# Altium PCB DriverControlsPCB.PcbDoc
Units mm, origin at the board's own origin, x right, y up, seen from the top; angles counter-clockwise.
Board outline 165.35 x 38.23 mm, 2 copper layers (Top Layer, Bottom Layer); 129 components, 72 nets, 429 pads, 61 vias.
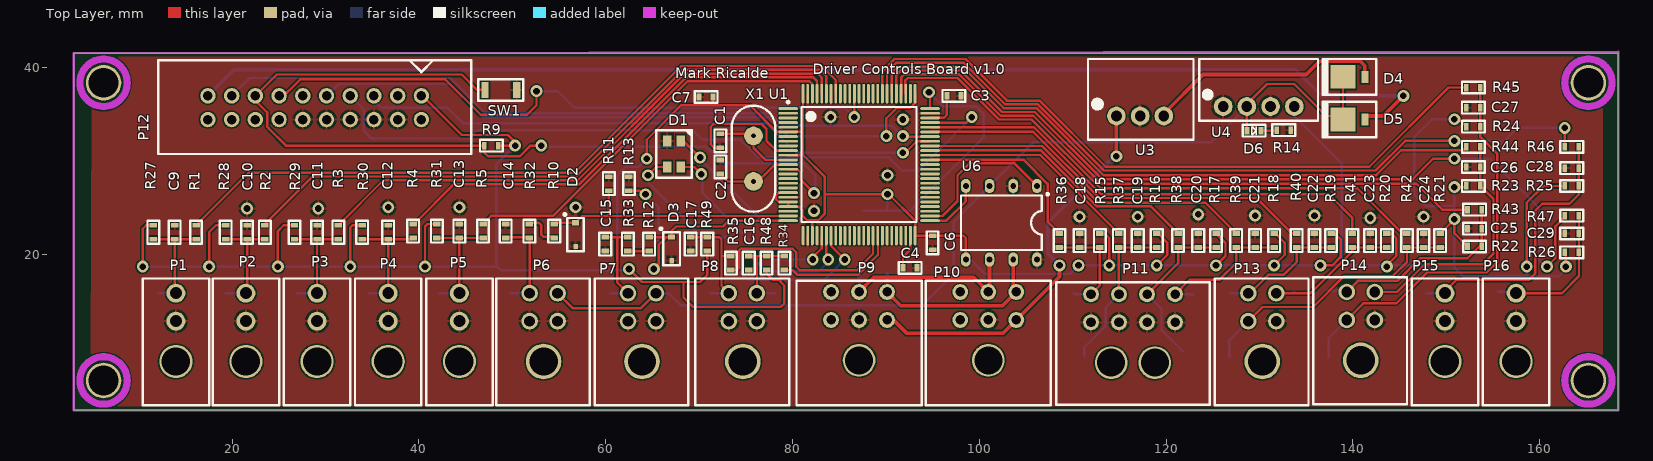
[diagram p0: Top Layer view]
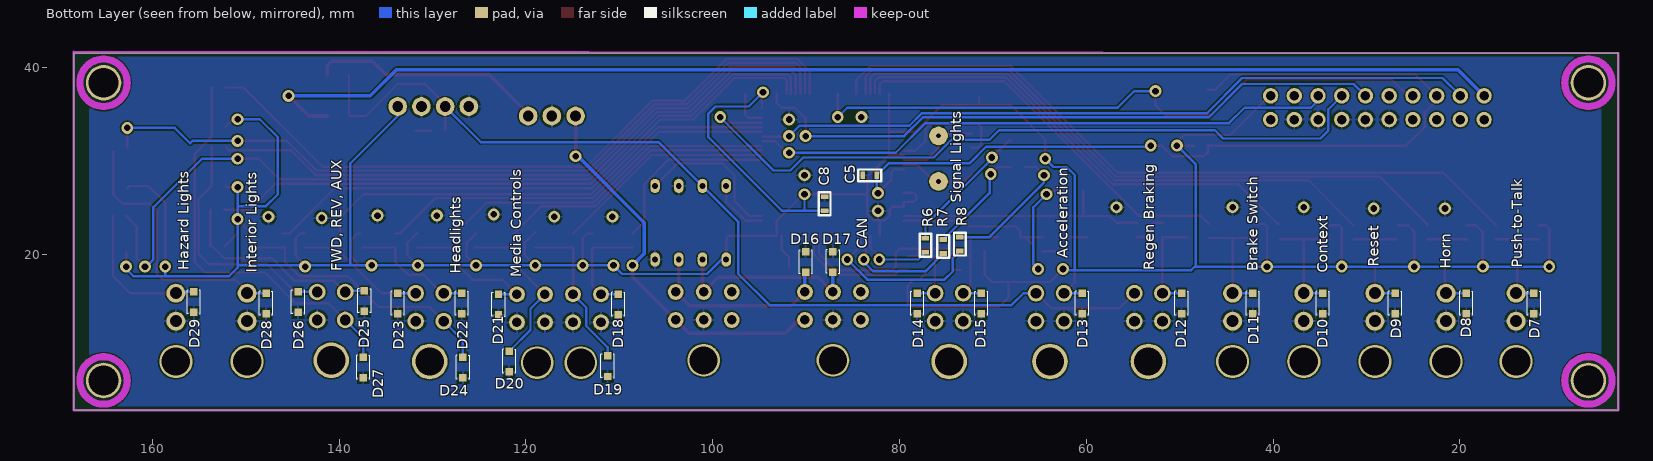
[diagram p1: Bottom Layer view, seen from below]
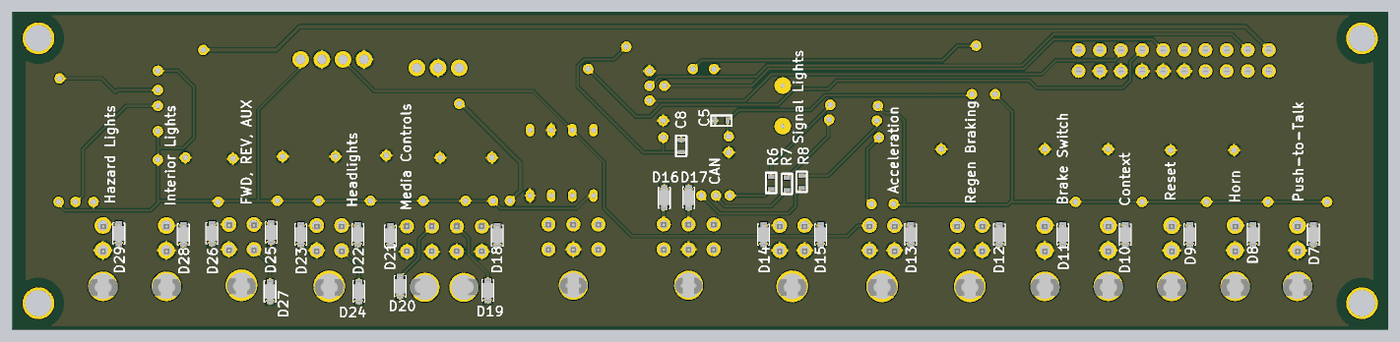
[diagram p2: 3D render of the assembled board from below, using the file's embedded part models]

## Layer stack, top to bottom
Top Solder: solder mask 0.0102, Solder Resist, Dk 3.5
Top Layer: signal copper 0.0356
Dielectric 1: dielectric 0.32, FR-4, Dk 4.8
Bottom Layer: signal copper 0.0356
Bottom Solder: solder mask 0.0102, Solder Resist, Dk 3.5

## Board outline
3.048,3.302 168.402,3.302 168.402,41.529 3.048,41.529

## Design rules (kind name [scope] priority, off if disabled: settings)
BoardOutlineClearance [All] p1: gap=0.381 ignorepadtopadclearanceinfootprint=FALSE
Clearance [All] p1: gap=0.152 ignorepadtopadclearanceinfootprint=FALSE except(0: Arc-Hole Track-Hole SMDPad-Hole THPad-Hole Via-Hole Fill-Hole Poly-Hole Region-Hole Text-Hole)
DiffPairsRouting [All] p1: maxlimit=0.254 minlimit=0.254 mostfreqgap=0.254 toplayer_minwidth=0.381 toplayer_maxwidth=0.381 toplayer_prefwidth=0.381 bottomlayer_minwidth=0.381 bottomlayer_maxwidth=0.381 bottomlayer_prefwidth=0.381 maxuncoupledlength=12.7
HoleSize [All] p1: absolutevalues=TRUE maxlimit=5.08 minlimit=0.33 maxpercent=80.000 minpercent=20.000
MinimumAnnularRing [All] p1: minimumring=0.178
MinimumSolderMaskSliver [All] p1: minsoldermaskwidth=0.127
PolygonConnect [All] p1: connectstyle=Relief reliefconductorwidth=0.254 reliefentries=4 polygonreliefangle="90 Angle" airgapwidth=0.254
RoutingVias [All] p1: holewidth=0.711 width=1.27 viastyle="Through Hole" minholewidth=0.711 minwidth=1.27 maxholewidth=0.711 maxwidth=1.27
SilkToSilkClearance [All] p1: silktosilkclearance=0.025
SilkToSolderMaskClearance [IsPad] p1: minsilkscreentomaskgap=0.076 clearancetoexposedcopper=TRUE
SolderMaskExpansion [All] p1: expansion=0.102
Width [All] p1: maxlimit=0.508 minlimit=0.152 preferedwidth=0.254
25 further rules are at their usual default settings.

## Classes and differential pairs
component class Communications: U6
component class Connectors: C9 C10 C11 C12 C13 C14 C15 C16 C17 C18 C19 C20 C21 D7 D8 D9 D10 D11 D12 D13 D14 D15 D16 D17 D18 D19 D20 D21 P1 P2 P3 P4 P5 P6 P7 P8 P9 P10 P11 P12 R1 R2 R3 R4 R5 R15 R16 R17 R18 R27 R28 R29 R30 R31 R32 R33 R34 R35 R36 R37 R38 R39 R48 R49
component class MCU: C1 C2 C3 C4 C5 D1 R6 R7 R8 R9 SW1 U1 X1
component class Power: C6 C7 C8 D4 D5 D6 R14 U3 U4
component class Signals: D2 D3 R10 R11 R12 R13
component class Connectors2: C22 C23 C24 C25 C26 C27 C28 C29 D22 D23 D24 D25 D26 D27 D28 D29 P13 P14 P15 P16 R19 R20 R21 R22 R23 R24 R25 R26 R40 R41 R42 R43 R44 R45 R46 R47
differential pair CAN2: +CAN2_P -CAN2_N

## Components (designator, comment, footprint, x,y, rotation, side; value= is the part's Value field where it differs from the comment)
C1 "SCH_GENERIC_CAPACITOR_0603" PCB_GENERIC_SMD_0603 72.263,32.131 r90 top
C2 "SCH_GENERIC_CAPACITOR_0603" PCB_GENERIC_SMD_0603 72.263,29.337 r270 top
C3 "SCH_GENERIC_CAPACITOR_0603" PCB_GENERIC_SMD_0603 97.282,36.957 r180 top
C4 "SCH_GENERIC_CAPACITOR_0603" PCB_GENERIC_SMD_0603 92.583,18.542 r180 top
C5 "SCH_GENERIC_CAPACITOR_0603" PCB_GENERIC_SMD_0603 83.185,28.448 r0 bottom
C6 "SCH_GENERIC_CAPACITOR_0603" PCB_GENERIC_SMD_0603 94.996,21.209 r90 top
C7 "SCH_GENERIC_CAPACITOR_0603" PCB_GENERIC_SMD_0603 70.739,36.83 r0 top
C8 "SCH_GENERIC_CAPACITOR_0603" PCB_GENERIC_SMD_0603 88.011,25.4 r270 bottom
C9 "SCH_GENERIC_CAPACITOR_0603" PCB_GENERIC_SMD_0603 13.843,22.352 r270 top
C10 "SCH_GENERIC_CAPACITOR_0603" PCB_GENERIC_SMD_0603 21.59,22.352 r270 top
C11 "SCH_GENERIC_CAPACITOR_0603" PCB_GENERIC_SMD_0603 29.083,22.352 r270 top
C12 "SCH_GENERIC_CAPACITOR_0603" PCB_GENERIC_SMD_0603 36.703,22.352 r90 top
C13 "SCH_GENERIC_CAPACITOR_0603" PCB_GENERIC_SMD_0603 44.323,22.479 r90 top
C14 "SCH_GENERIC_CAPACITOR_0603" PCB_GENERIC_SMD_0603 49.276,22.479 r90 top
C15 "SCH_GENERIC_CAPACITOR_0603" PCB_GENERIC_SMD_0603 59.944,21.082 r90 top
C16 "SCH_GENERIC_CAPACITOR_0603" PCB_GENERIC_SMD_0603 75.311,19.05 r90 top
C17 "SCH_GENERIC_CAPACITOR_0603" PCB_GENERIC_SMD_0603 69.088,21.082 r90 top
C18 "SCH_GENERIC_CAPACITOR_0603" PCB_GENERIC_SMD_0603 110.744,21.463 r270 top
C19 "SCH_GENERIC_CAPACITOR_0603" PCB_GENERIC_SMD_0603 116.967,21.463 r270 top
C20 "SCH_GENERIC_CAPACITOR_0603" PCB_GENERIC_SMD_0603 123.444,21.463 r270 top
C21 "SCH_GENERIC_CAPACITOR_0603" PCB_GENERIC_SMD_0603 129.54,21.463 r270 top
C22 "SCH_GENERIC_CAPACITOR_0603" PCB_GENERIC_SMD_0603 135.89,21.463 r270 top
C23 "SCH_GENERIC_CAPACITOR_0603" PCB_GENERIC_SMD_0603 141.859,21.463 r270 top
C24 "SCH_GENERIC_CAPACITOR_0603" PCB_GENERIC_SMD_0603 147.574,21.463 r270 top
C25 "SCH_GENERIC_CAPACITOR_0603" PCB_GENERIC_SMD_0603 153.035,22.733 r0 top
C26 "SCH_GENERIC_CAPACITOR_0603" PCB_GENERIC_SMD_0603 152.908,29.337 r0 top
C27 "SCH_GENERIC_CAPACITOR_0603" PCB_GENERIC_SMD_0603 152.908,35.687 r0 top
C28 "SCH_GENERIC_CAPACITOR_0603" PCB_GENERIC_SMD_0603 163.449,29.21 r180 top
C29 "SCH_GENERIC_CAPACITOR_0603" PCB_GENERIC_SMD_0603 163.449,22.225 r180 top
D1 "TriColourLED" "TricolourLED - SunLED - DK  1497-1225-2-ND" 67.31,30.734 r90 top
D2 "Zener Diode" PCBComponent_1 56.769,22.098 r90 top
D3 "Zener Diode" PCBComponent_1 67.056,20.574 r90 top
D4 "Schottky Diode" "ON Semi Schottky Diode - MBRM110LT1G" 140.589,38.989 r0 top
D5 "Schottky Diode" "ON Semi Schottky Diode - MBRM110LT1G" 140.589,34.417 r0 top
D6 "RED LED" SMD_0603_LED 129.413,33.274 r0 top
D7 "TVS Diode" "TVS Diode" 12.065,14.732 r0 bottom
D8 "TVS Diode" "TVS Diode" 19.304,14.732 r180 bottom
D9 "TVS Diode" "TVS Diode" 26.924,14.732 r180 bottom
D10 "TVS Diode" "TVS Diode" 34.671,14.732 r180 bottom
D11 "TVS Diode" "TVS Diode" 42.164,14.732 r180 bottom
D12 "TVS Diode" "TVS Diode" 49.784,14.732 r180 bottom
D13 "TVS Diode" "TVS Diode" 60.452,14.732 r180 bottom
D14 "TVS Diode" "TVS Diode" 78.105,14.732 r0 bottom
D15 "TVS Diode" "TVS Diode" 71.247,14.732 r0 bottom
D16 "TVS Diode" "TVS Diode" 90.043,19.177 r0 bottom
D17 "TVS Diode" "TVS Diode" 87.122,19.177 r180 bottom
D18 "TVS Diode" "TVS Diode" 110.109,14.605 r180 bottom
D19 "TVS Diode" "TVS Diode" 111.252,8.001 r180 bottom
D20 "TVS Diode" "TVS Diode" 121.793,8.509 r180 bottom
D21 "TVS Diode" "TVS Diode" 122.936,14.605 r0 bottom
D22 "TVS Diode" "TVS Diode" 126.873,14.732 r180 bottom
D23 "TVS Diode" "TVS Diode" 133.731,14.732 r180 bottom
D24 "TVS Diode" "TVS Diode" 126.746,7.874 r180 bottom
D25 "TVS Diode" "TVS Diode" 137.287,14.986 r180 bottom
D26 "TVS Diode" "TVS Diode" 144.399,14.859 r180 bottom
D27 "TVS Diode" "TVS Diode" 137.414,7.874 r180 bottom
D28 "TVS Diode" "TVS Diode" 147.828,14.732 r180 bottom
D29 "TVS Diode" "TVS Diode" 155.575,14.859 r180 bottom
P1 "SCH_MLX_1X2" PCB_MLX_MICROFIT_1X2 13.97,10.541 r0 top
P2 "SCH_MLX_1X2" PCB_MLX_MICROFIT_1X2 21.463,10.541 r0 top
P3 "SCH_MLX_1X2" PCB_MLX_MICROFIT_1X2 29.083,10.541 r0 top
P4 "SCH_MLX_1X2" PCB_MLX_MICROFIT_1X2 36.703,10.541 r0 top
P5 "SCH_MLX_1X2" PCB_MLX_MICROFIT_1X2 44.323,10.541 r0 top
P6 "MLX_MICROFIT_2X2" MLX_MICROFIT_2X2 53.34,10.541 r0 top
P7 "MLX_MICROFIT_2X2" MLX_MICROFIT_2X2 63.881,10.541 r0 top
P8 "MLX_MICROFIT_2X2" MLX_MICROFIT_2X2 74.676,10.541 r0 top
P9 "SCH_MLX_MICROFIT_3X2" PCB_MLX_MICROFIT_3X2 87.122,8.636 r0 top
P10 "SCH_MLX_MICROFIT_3X2" PCB_MLX_MICROFIT_3X2 100.965,8.636 r0 top
P11 "SCH_MLX_MICROFIT_4X2" PCB_MLX_MICROFIT_4X2 116.459,12.7 r0 top
P12 "SWD/VCOM Header - J-Link" "Samtec TST-110-01-G-D" 17.399,36.957 r0 top
P13 "MLX_MICROFIT_2X2" MLX_MICROFIT_2X2 130.302,10.541 r0 top
P14 "MLX_MICROFIT_2X2" MLX_MICROFIT_2X2 140.843,10.668 r0 top
P15 "SCH_MLX_1X2" PCB_MLX_MICROFIT_1X2 149.86,10.541 r0 top
P16 "SCH_MLX_1X2" PCB_MLX_MICROFIT_1X2 157.48,10.541 r0 top
R1 "SCH_GENERIC_RESISTOR_0603" PCB_GENERIC_SMD_0603 16.129,22.352 r90 top
R2 "SCH_GENERIC_RESISTOR_0603" PCB_GENERIC_SMD_0603 23.495,22.352 r90 top
R3 "SCH_GENERIC_RESISTOR_0603" PCB_GENERIC_SMD_0603 31.369,22.352 r90 top
R4 "SCH_GENERIC_RESISTOR_0603" PCB_GENERIC_SMD_0603 39.37,22.479 r90 top
R5 "SCH_GENERIC_RESISTOR_0603" PCB_GENERIC_SMD_0603 46.863,22.479 r90 top
R6 "SCH_GENERIC_RESISTOR_0603" PCB_GENERIC_SMD_0603 77.216,20.955 r90 bottom
R7 "SCH_GENERIC_RESISTOR_0603" PCB_GENERIC_SMD_0603 75.311,20.828 r90 bottom
R8 "SCH_GENERIC_RESISTOR_0603" PCB_GENERIC_SMD_0603 73.533,21.082 r90 bottom
R9 "SCH_GENERIC_RESISTOR_0603" PCB_GENERIC_SMD_0603 47.752,31.623 r180 top
R10 "SCH_GENERIC_RESISTOR_0603" PCB_GENERIC_SMD_0603 54.483,22.479 r270 top
R11 "SCH_GENERIC_RESISTOR_0603" PCB_GENERIC_SMD_0603 60.325,27.559 r270 top
R12 "SCH_GENERIC_RESISTOR_0603" PCB_GENERIC_SMD_0603 64.643,21.082 r270 top
R13 "SCH_GENERIC_RESISTOR_0603" PCB_GENERIC_SMD_0603 62.484,27.559 r270 top
R14 "SCH_GENERIC_RESISTOR_0603" PCB_GENERIC_SMD_0603 132.588,33.274 r0 top
R15 "SCH_GENERIC_RESISTOR_0603" PCB_GENERIC_SMD_0603 112.903,21.463 r270 top
R16 "SCH_GENERIC_RESISTOR_0603" PCB_GENERIC_SMD_0603 118.999,21.463 r270 top
R17 "SCH_GENERIC_RESISTOR_0603" PCB_GENERIC_SMD_0603 125.349,21.463 r270 top
R18 "SCH_GENERIC_RESISTOR_0603" PCB_GENERIC_SMD_0603 131.572,21.463 r270 top
R19 "SCH_GENERIC_RESISTOR_0603" PCB_GENERIC_SMD_0603 137.668,21.463 r270 top
R20 "SCH_GENERIC_RESISTOR_0603" PCB_GENERIC_SMD_0603 143.637,21.463 r270 top
R21 "SCH_GENERIC_RESISTOR_0603" PCB_GENERIC_SMD_0603 149.352,21.463 r270 top
R22 "SCH_GENERIC_RESISTOR_0603" PCB_GENERIC_SMD_0603 153.035,20.828 r0 top
R23 "SCH_GENERIC_RESISTOR_0603" PCB_GENERIC_SMD_0603 152.908,27.305 r0 top
R24 "SCH_GENERIC_RESISTOR_0603" PCB_GENERIC_SMD_0603 152.908,33.655 r0 top
R25 "SCH_GENERIC_RESISTOR_0603" PCB_GENERIC_SMD_0603 163.449,27.305 r180 top
R26 "SCH_GENERIC_RESISTOR_0603" PCB_GENERIC_SMD_0603 163.449,20.193 r180 top
R27 "SCH_GENERIC_RESISTOR_0603" PCB_GENERIC_SMD_0603 11.557,22.352 r270 top
R28 "SCH_GENERIC_RESISTOR_0603" PCB_GENERIC_SMD_0603 19.304,22.352 r270 top
R29 "SCH_GENERIC_RESISTOR_0603" PCB_GENERIC_SMD_0603 26.67,22.352 r270 top
R30 "SCH_GENERIC_RESISTOR_0603" PCB_GENERIC_SMD_0603 33.909,22.352 r90 top
R31 "SCH_GENERIC_RESISTOR_0603" PCB_GENERIC_SMD_0603 41.91,22.479 r90 top
R32 "SCH_GENERIC_RESISTOR_0603" PCB_GENERIC_SMD_0603 51.816,22.479 r90 top
R33 "SCH_GENERIC_RESISTOR_0603" PCB_GENERIC_SMD_0603 62.357,21.082 r90 top
R34 "SCH_GENERIC_RESISTOR_0603" PCB_GENERIC_SMD_0603 79.121,19.05 r90 top
R35 "SCH_GENERIC_RESISTOR_0603" PCB_GENERIC_SMD_0603 73.406,19.05 r90 top
R36 "SCH_GENERIC_RESISTOR_0603" PCB_GENERIC_SMD_0603 108.585,21.463 r270 top
R37 "SCH_GENERIC_RESISTOR_0603" PCB_GENERIC_SMD_0603 114.935,21.463 r270 top
R38 "SCH_GENERIC_RESISTOR_0603" PCB_GENERIC_SMD_0603 121.285,21.463 r270 top
R39 "SCH_GENERIC_RESISTOR_0603" PCB_GENERIC_SMD_0603 127.508,21.463 r270 top
R40 "SCH_GENERIC_RESISTOR_0603" PCB_GENERIC_SMD_0603 133.985,21.463 r270 top
R41 "SCH_GENERIC_RESISTOR_0603" PCB_GENERIC_SMD_0603 139.954,21.463 r270 top
R42 "SCH_GENERIC_RESISTOR_0603" PCB_GENERIC_SMD_0603 145.796,21.463 r270 top
R43 "SCH_GENERIC_RESISTOR_0603" PCB_GENERIC_SMD_0603 153.035,24.765 r0 top
R44 "SCH_GENERIC_RESISTOR_0603" PCB_GENERIC_SMD_0603 152.908,31.496 r0 top
R45 "SCH_GENERIC_RESISTOR_0603" PCB_GENERIC_SMD_0603 152.908,37.846 r0 top
R46 "SCH_GENERIC_RESISTOR_0603" PCB_GENERIC_SMD_0603 163.449,31.496 r0 top
R47 "SCH_GENERIC_RESISTOR_0603" PCB_GENERIC_SMD_0603 163.449,24.13 r0 top
R48 "SCH_GENERIC_RESISTOR_0603" PCB_GENERIC_SMD_0603 77.216,19.05 r270 top
R49 "SCH_GENERIC_RESISTOR_0603" PCB_GENERIC_SMD_0603 70.866,21.082 r90 top
SW1 "Reset Switch" "Push Button Switch" 48.768,37.592 r0 top
U1 "STM32F407VGT6" STM-LQFP100_M 87.122,29.591 r0 top
U3 "R78E-1.0 DC/DC" R78-1.0 117.221,34.798 r0 top
U4 "RECOM RO Series" "RECOM RO Series 1W DCDC" 126.111,35.814 r0 top
U6 "MCP2562" MCP2562 102.362,23.368 r270 top
X1 "XTAL" CRYSTAL_8MHZ 75.819,30.226 r270 top

## Footprints (in the part's own frame and the unit in brackets; to place one, negate y for a bottom-side part, rotate by r counter-clockwise, add the part's x,y. Pads: shape width x height; smd on the part's side, far side on the other; paste and mask are expansions set on the pad)
CRYSTAL_8MHZ [mm] "631-1100-ND"
  round 2 hole 0.5: 1(-2.44,0) 2(2.44,0)
  silkscreen extent -5.68,-2.32 5.68,2.32, body extent -5.59,-1.85 5.59,1.85, height 3.6
MCP2562 [mil]
  oval 60x40 hole 25: 1(-155,150) 2(-155,50) 3(-155,-50) 4(-155,-150) 5(155,-150) 6(155,-50) 7(155,50) 8(155,150)
  silkscreen extent -125,-170 115,200, body extent -115,-170 115,170, height 210
MLX_MICROFIT_2X2 [mil]
  round 70 hole 45: 1(59,90) 2(-59,90) 3(59,208) 4(-59,208)
  round 150 hole 120: ""(0,-80)
  silkscreen extent -200,-265 195,270, body extent -200,-266 200,216, height 345
"ON Semi Schottky Diode - MBRM110LT1G" [mil]
  rect 105x100 smd: 1(-65,0)
  rect 30x50 smd: 2(27.5,0)
  silkscreen extent -150,-75 75,75, body extent -115,-65 0,65, height 40
PCB_GENERIC_SMD_0603 [mm]
  rect 0.5x0.8 smd: 1(-0.75,0) 2(0.75,0)
  silkscreen extent -1.22,-0.63 1.22,0.63, body extent -0.75,-0.5 0.75,0.5, height 0.45
PCB_MLX_MICROFIT_1X2 [mil]
  round 80 hole 50: 1(0,90) 2(0,208)
  round 140 hole 120: ""(0,-80)
  silkscreen extent -140,-265 140,270, body extent -141,-266 140,216, height 345
PCB_MLX_MICROFIT_3X2 [mm]
  round 1.7 hole 1.02: 1(3,4.32) 2(0,4.32) 3(-3,4.32) 4(3,7.32) 5(0,7.32) 6(-3,7.32)
  round 3.5 hole 3: ""(0,0)
  silkscreen extent -6.7,-4.8 6.7,8.5, body extent -6.57,-4.65 6.58,7.59, height 8.83
PCB_MLX_MICROFIT_4X2 [mm] "Molex MicroFit 4x2 Connector"
  round 1.7 hole 1.02: 1(4.5,0) 2(1.5,0) 3(-1.5,0) 4(-4.5,0) 5(4.5,3) 6(1.5,3) 7(-1.5,3) 8(-4.5,3)
  round 3.5 hole 3: ""(-2.34,-4.32) ""(2.34,-4.32)
  silkscreen extent -8.23,-8.82 8.2,4.28, body extent -8.05,-8.87 8.1,3.37, height 8.83
PCBComponent_1 [mm]
  rect 0.55x0.75 smd: 1(1.27,0)
  rect 0.55x0.5 smd: 2(-1.27,0)
  silkscreen extent -1.78,-0.89 2.29,1.27, body extent -0.89,-0.64 0.89,0.64, height 0.7
"Push Button Switch" [mm]
  rect 0.8x1.7 smd: 1(-1.7,0) 2(1.7,0)
  silkscreen extent -2.41,-1.14 2.41,1.14, body extent -2.16,-0.89 2.16,0.89, height 1.6
R78-1.0 [mm]
  round 2 hole 1.15: 1(-2.54,0) 2(0,0) 3(2.54,0)
  silkscreen extent -5.59,-2.54 5.71,6.1, body extent -4.44,-1.59 4.45,5.4, height 10.4
"RECOM RO Series 1W DCDC" [mm] "RO-053.3S"
  round 2 hole 1.15: 1(0,0) 2(2.54,0) 3(5.08,0) 4(7.62,0)
  silkscreen extent -2.54,-1.52 10.16,5.08, body extent -2.41,-1.4 10.03,4.95, height 10
"Samtec TST-110-01-G-D" [mil] "TST-110-01-G-D"
  round 65 hole 40: 1(900,0) 2(900,-100) 3(800,0) 4(800,-100) 5(700,0) 6(700,-100) 7(600,0) 8(600,-100) 9(500,0) 10(500,-100) 11(400,0) 12(400,-100) 13(300,0) 14(300,-100) 15(200,0) 16(200,-100) 17(100,0) 18(100,-100) 19(0,0) 20(0,-100)
  silkscreen extent -210,-245 1110,150, body extent -200,-233 1100,132, height 350
SMD_0603_LED [mm]
  rect 0.5x0.8 smd: 1(-0.747,-0.047) 2(0.753,-0.047)
  silkscreen extent -1.22,-0.67 1.23,0.58, body extent -0.75,-0.55 0.75,0.45, height 0.45
STM-LQFP100_M [mm] "Thin QFP, 100-Leads, Body 14x14mm, Pitch 0.5mm, IPC Low Density"
  oval 2.1x0.3 smd: 1(-7.6,6) 2(-7.6,5.5) 3(-7.6,5) 4(-7.6,4.5) 5(-7.6,4) 6(-7.6,3.5) 7(-7.6,3) 8(-7.6,2.5) 9(-7.6,2) 10(-7.6,1.5) 11(-7.6,1) 12(-7.6,0.5) 13(-7.6,0) 14(-7.6,-0.5) 15(-7.6,-1) 16(-7.6,-1.5) 17(-7.6,-2) 18(-7.6,-2.5) 19(-7.6,-3) 20(-7.6,-3.5) 21(-7.6,-4) 22(-7.6,-4.5) 23(-7.6,-5) 24(-7.6,-5.5) 25(-7.6,-6) 51(7.6,-6) 52(7.6,-5.5) 53(7.6,-5) 54(7.6,-4.5) 55(7.6,-4) 56(7.6,-3.5) 57(7.6,-3) 58(7.6,-2.5) 59(7.6,-2) 60(7.6,-1.5) 61(7.6,-1) 62(7.6,-0.5) 63(7.6,0) 64(7.6,0.5) 65(7.6,1) 66(7.6,1.5) 67(7.6,2) 68(7.6,2.5) 69(7.6,3) 70(7.6,3.5) 71(7.6,4) 72(7.6,4.5) 73(7.6,5) 74(7.6,5.5) 75(7.6,6)
  oval 0.3x2.1 smd: 26(-6,-7.6) 27(-5.5,-7.6) 28(-5,-7.6) 29(-4.5,-7.6) 30(-4,-7.6) 31(-3.5,-7.6) 32(-3,-7.6) 33(-2.5,-7.6) 34(-2,-7.6) 35(-1.5,-7.6) 36(-1,-7.6) 37(-0.5,-7.6) 38(0,-7.6) 39(0.5,-7.6) 40(1,-7.6) 41(1.5,-7.6) 42(2,-7.6) 43(2.5,-7.6) 44(3,-7.6) 45(3.5,-7.6) 46(4,-7.6) 47(4.5,-7.6) 48(5,-7.6) 49(5.5,-7.6) 50(6,-7.6) 76(6,7.6) 77(5.5,7.6) 78(5,7.6) 79(4.5,7.6) 80(4,7.6) 81(3.5,7.6) 82(3,7.6) 83(2.5,7.6) 84(2,7.6) 85(1.5,7.6) 86(1,7.6) 87(0.5,7.6) 88(0,7.6) 89(-0.5,7.6) 90(-1,7.6) 91(-1.5,7.6) 92(-2,7.6) 93(-2.5,7.6) 94(-3,7.6) 95(-3.5,7.6) 96(-4,7.6) 97(-4.5,7.6) 98(-5,7.6) 99(-5.5,7.6) 100(-6,7.6)
  silkscreen extent -7.72,-6.15 6.15,6.82, body extent -7,-7 7,7, height 1.6
"TricolourLED - SunLED - DK  1497-1225-2-ND" [mm]
  rect 1.2x0.9 smd: 1(1.4,-0.725) 2(-1.4,-0.725) 3(-1.4,0.725) 4(1.4,0.725)
  silkscreen extent -2.54,-1.91 2.54,1.91, body extent -1.84,-1.52 1.84,1.52, height 1.9
"TVS Diode" [mm]
  rect 0.8x0.8 smd: 1(0,1.1) 2(0,-1.1)
  silkscreen extent -0.71,-1.27 0.71,1.3, body extent -0.65,-1.27 0.65,1.27, height 1.04

## Part data
C1 C2 C3 C4 C5 C6 C7 C8 C9 C10 C11 C12 C13 C14 C15 C16 C17 C18 C19 C20 C21 C22 C23 C24 C25 C26 C27 C28 C29: "Generic SMD capacitor 0603"
D2 D3 D4 D5: library part "ON Semi Schottky Diode - MBRM110LT1G"
D6: library part SMD_0603_LED
P11: "Molex Microfit Connector 4x2"
P12: library part "SWD/VCOM Header"
R1 R2 R3 R4 R5 R6 R7 R8 R9 R10 R11 R12 R13 R14 R15 R16 R17 R18 R19 R20 R21 R22 R23 R24 R25 R26 R27 R28 R29 R30 R31 R32 R33 R34 R35 R36 R37 R38 R39 R40 R41 R42 R43 R44 R45 R46 R47 R48 R49: "Generic SMD resistor 0603"
SW1: library part PushButtonSwitch
U1: "ARM Cortex-M4 32-bit MCU+FPU, 210 DMIPS, 1024 kB Flash, 192 kB Internal RAM, 82 I/Os, 100-pin LQFP, -40 to 85 degC, Tray"
U3: library part R78E-1.0
U4: library part "RECOM RO Series DCDC Converter"
X1: library part Crystal

## Free pads (board coordinates)
  round 3.81 hole 3.175: ""(6.223,6.477) ""(6.223,38.354) ""(165.227,6.477) ""(165.227,38.354)

## Via types
v1: diameter 1.27, hole 0.711, Top Layer to Bottom Layer, 61 vias

## Nets (pads, with @x,y where several pads share a name; then routed paths per layer and width w, separated by ;. In a path a pad name is that pad's centre, name@x,y a point inside that pad or via, vN(x,y) a via of type N, cw(c..) or ccw(c..) an arc to the next point about the centre after c; other vN are vias at no path point)
"3.3 V": C6.2 C7.2 C8.2 P12.1 R9.1 R15.1 R16.1 R17.1 R18.1 R19.1 R20.1 R21.1 R22.1 R23.1 R24.1 R25.2 R26.2 R27.1 R28.1 R29.1 R30.2 R31.2 R48.2 R49.1 U1.6 U1.11 U1.19 U1.21 U1.22 U1.28 U1.50 U1.75 U1.100 U4.4 U6.5 | length 409.4
  Top Layer w0.254: v1(10.414,18.669) 10.414,22.721 10.795,23.102 R27.1 ; v1(17.526,18.669) 17.526,22.352 18.276,23.102 R28.1 ; v1(24.892,18.669) 24.892,22.479 25.515,23.102 R29.1 ; v1(32.639,18.669) 32.639,22.86 32.881,23.102 R30.2 ; v1(40.64,18.669) 40.64,22.963 40.906,23.229 R31.2 ; P12.1@40.894,36.449 44.577,32.766 49.53,32.766 50.292,32.004 v1(50.292,31.623) R9.1 ; v1@62.611,18.542 v1(62.484,18.415) 63.881,17.018 70.104,17.018 70.866,17.78 R49.1 ; v1(64.389,30.226) 64.389,32.258 68.072,35.941 75.438,35.941 78.288,33.091 U1.6 81.122,33.091 ; 68.326,17.018 68.326,15.367 69.342,14.351 78.74,14.351 79.121,14.732 79.121,16.637 78.486,17.272 77.851,17.272 77.216,17.907 R48.2 ; 71.489,35.941 C7.2 ; U1.19 78.515,26.591 78.193,26.269 78.193,25.913 78.515,25.591 U1.21 U1.22 80.7,25.091 81.026,24.765 81.026,24.163 81.567,23.622 82.042,23.622 ; U1.11 81.153,30.591 ; U1.100 81.122,33.091 ; U1.28 82.122,23.542 82.042,23.622 ; v1(94.615,37.338) 94.722,37.231 U1.75 ; U6.5 98.552,21.717 98.278,21.991 U1.50 93.122,23.591 90.297,26.416 v1(90.17,26.416) 83.439,26.416 ; R15.1 113.423,22.213 113.919,21.717 v1(113.919,18.796) ; v1(118.999,18.796) 120.142,19.939 120.142,21.197 R16.1@118.999,22.34 ; v1(125.349,18.796) 126.365,19.812 126.365,21.197 R17.1 ; v1(131.572,18.796) 132.715,19.939 132.715,21.209 131.711,22.213 R18.1 ; v1(136.525,18.796) 137.795,18.796 138.684,19.685 138.684,21.59 138.061,22.213 R19.1 ; v1(143.637,18.669) 143.637,18.796 144.653,19.812 144.653,21.717 144.157,22.213 R20.1 ; R21.1 149.352,22.225 v1(150.876,23.749) 150.876,22.237 R22.1 ; v1(150.876,27.178) 152.031,27.178 R23.1 ; v1(150.876,34.449) 151.364,34.449 R24.1 ; v1(158.623,18.669) 158.623,25.527 160.401,27.305 162.445,27.305 R25.2@162.699,27.051 ; v1(162.814,18.669) R26.2@162.814,20.193 ; 81.122,33.091 81.122,30.622 81.153,30.591 ; 81.153,30.591 83.439,28.305 83.439,26.416 ; 82.042,23.622 82.746,23.622 83.439,24.315 83.439,26.416
  Bottom Layer w0.254: v1(10.414,18.669) v1(17.526,18.669) v1(24.892,18.669) v1@32.385,18.669 ; v1(32.639,18.669) 48.26,18.669 ; v1(50.292,31.623) 48.26,29.591 48.26,18.796 48.768,18.288 61.849,18.288 ; 61.214,18.288 61.214,28.448 62.103,29.337 63.5,29.337 v1(64.389,30.226) ; C8.2@87.618,24.65 C8.2 90.17,24.65 ; v1(90.17,26.416) 90.17,24.65 ; v1(94.615,37.338) 96.139,35.814 99.695,35.814 100.457,35.052 100.457,32.512 92.595,24.65 90.17,24.65 ; U6.5 99.06,19.431 100.609,17.882 109.703,17.882 v1(110.617,18.796) v1(113.919,18.796) v1(118.999,18.796) 138.811,18.796 ; U4.4@133.731,36.068 133.731,34.798 138.811,29.718 138.811,18.796 ; 150.876,18.796 138.811,18.796 ; v1(150.876,27.178) 150.876,25.146 ; v1(150.876,34.449) 148.495,34.449 146.558,32.512 146.558,26.416 147.828,25.146 150.876,25.146 ; 158.623,17.78 v1(158.623,18.669) ; v1(162.814,18.669) 162.814,18.415 162.052,17.653 151.765,17.653 150.876,18.542 150.876,23.368 150.495,23.749 150.876,24.13 150.876,25.146
"5 V": D4.1 D5.1 D6.1 P6.3 P7.3 U4.2 U6.3 | length 107.9
  Top Layer w0.254: P6.3 56.439,14.224 63.779,14.224 P7.3 ; D6.1@128.651,33.242 128.651,36.068 130.81,38.227 133.731,38.227 137.16,34.798 138.938,34.798 D4.1@138.938,39.243
  Bottom Layer w0.254: P7.3 66.726,15.824 68.008,14.541 93.916,14.541 97.282,17.907 97.282,23.495 U6.3 105.791,32.004 124.841,32.004 U4.2 U4.2@128.651,36.068
"5V - DCDC": D4.2 U3.3 | length 25
  Top Layer w0.381: U3.3@119.761,35.052 123.952,39.243 135.001,39.243 136.398,40.64 140.843,40.64 141.287,40.195 D4.2@141.287,39.243
"5V - DEBUG": D5.2 P12.19 | length 135.9
  Top Layer w0.381: D5.2@141.287,34.798 143.256,34.798 v1(145.415,36.957)
  Bottom Layer w0.381: P12.19@17.399,36.449 P12.19 20.193,39.751 133.858,39.751 136.652,36.957 v1(145.415,36.957)
"12 V": P9.1 P10.1 U3.1 | length 42.7
  Top Layer w0.381: P9.1 90.803,12.956 92.202,11.557 102.566,11.557 P10.1 108.585,17.576 v1(108.585,18.796) ; v1(114.681,30.48) U3.1@114.681,35.052
  Bottom Layer w0.381: v1(108.585,18.796) 107.315,20.066 107.315,23.368 114.427,30.48 v1(114.681,30.48)
"ACCELERATION 1": R12.2 R33.1 | length 2.3
  Top Layer w0.254: R33.1 R12.2
"ACCELERATION 2": D3.1 R12.1 R13.2 U1.25 | length 30.7
  Top Layer w0.254: R13.2 63.615,26.809 64.008,26.416 v1(64.262,26.416) ; R12.1 66.536,21.832 ; v1(65.151,18.415) 65.659,18.923 65.659,20.955 66.536,21.832 ; D3.1@67.044,21.832 66.536,21.832 ; D3.1@67.044,21.844 D3.1 67.056,22.479 67.539,22.962 72.558,22.962 73.188,23.591 U1.25
  Bottom Layer w0.254: v1(64.262,26.416) 65.659,25.019 65.659,18.923 v1(65.151,18.415)
AUX: R43.1 U1.79 | length 68.6
  Top Layer w0.254: U1.79@91.669,37.144 U1.79 91.622,38.917 91.973,39.268 97.831,39.268 102.276,34.823 105.772,34.823 113.036,27.559 146.789,27.559 149.583,24.765 R43.1
"BLUE PUSHBUTTON": U1.23
BLUE_LED: R8.1 U1.32 | length 18.2
  Top Layer w0.254: U1.32 84.122,20.907 v1(85.598,19.431)
  Bottom Layer w0.254: R8.1 74.295,19.57 74.295,18.161 75.184,17.272 83.439,17.272 v1(85.598,19.431)
"BRAKE SWITCH": R5.2 U1.98 | length 42.7
  Top Layer w0.254: R5.2 47.739,24.105 54.344,24.105 68.759,38.52 81.8,38.52 82.122,38.198 U1.98
CAN2_N: D17.2 P9.5 P10.5 U6.6 | length 20.6
  Top Layer w0.381: P9.5 88.692,17.526 99.395,17.526 P10.5 101.092,16.083 U6.6
  Bottom Layer w0.381: P9.5 D17.2@87.122,17.907
CAN2_P: D16.1 P9.4 P10.4 U6.7 | length 20.6
  Top Layer w0.381: P9.4 91.6,14.478 102.487,14.478 P10.4 103.632,16.289 U6.7
  Bottom Layer w0.381: P9.4 D16.1@90.122,17.907
CAN2_RX: U1.51 U6.4 | length 6.3
  Top Layer w0.254: U1.51 96.489,23.591 98.552,25.654 U6.4
CAN2_TX: U1.52 U6.1 | length 16.4
  Top Layer w0.254: U1.52 96.051,24.091 97.663,25.703 97.663,28.448 98.933,29.718 103.759,29.718 U6.1
CONTEXT: R4.2 U1.97 | length 51.3
  Top Layer w0.254: R4.2 39.485,23.229 43.764,27.508 57.172,27.508 68.591,38.927 82.231,38.927 82.622,38.536 U1.97
FORWARD: R44.1 U1.81 | length 70.1
  Top Layer w0.254: U1.81 90.622,39.441 91.262,40.081 98.168,40.081 102.613,35.636 106.109,35.636 113.297,28.448 142.494,28.448 145.186,31.14 151.802,31.14 R44.1
GND: C1.1 C2.1 C3.1 C4.1 C5.2 C6.1 C7.1 C8.1 C9.1 C10.1 C11.1 C12.2 C13.2 C14.2 C15.1 C16.1 C17.1 C18.1 C19.1 C20.1 C21.1 C22.1 C23.1 C24.1 C25.1 C26.1 C27.1 C28.2 C29.2 D1.4 D2.2 D3.2 D7.1 D8.2 D9.2 D10.2 D11.2 D12.2 D13.2 D14.1 D15.1 D16.2 D17.1 D18.2 D19.2 D20.2 D21.1 D22.2 D23.2 D24.2 D25.2 D26.2 D27.2 D28.2 D29.2 P1.1 P2.1 P3.1 P4.1 P5.1 P6.1 P6.2 P7.1 P7.2 P8.1 P8.2 P9.2 P10.2 P11.1 P11.2 P11.3 P11.4 P12.4 P12.6 P12.8 P12.10 P12.12 P13.1 P14.1 P15.1 P16.1 R11.1 R13.1 R14.2 SW1.2 U1.10 U1.20 U1.27 U1.74 U1.94 U1.99 U3.2 U4.1 U4.3 U6.2 U6.8 | length 13.4
  Top Layer w0.254: C1.1 71.616,31.381 71.247,31.75 71.247,33.655 71.537,33.945 76.672,33.945 77.216,33.401 77.216,32.131 78.256,31.091 U1.10
  other v1: 141.859,23.876 110.744,24.003 116.967,24.003 147.574,24.003 129.54,24.13 135.89,24.13 123.444,24.257 82.296,24.638 21.59,24.892 29.21,24.892 36.703,25.019 44.323,25.019 56.769,25.019 90.17,28.448 91.821,34.417 84.074,34.671
GREEN_LED: R7.1 U1.31 | length 12.6
  Top Layer w0.254: U1.31 83.622,19.629 v1(83.82,19.431)
  Bottom Layer w0.254: R7.1 77.228,18.161 82.804,18.161 83.82,19.177 v1(83.82,19.431)
"HAZARD LIGHTS": R47.1 U1.80 | length 92
  Top Layer w0.254: U1.80@91.193,37.12 U1.80 91.122,39.179 91.618,39.675 98,39.675 102.445,35.23 105.94,35.23 113.129,28.042 146.406,28.042 148.59,30.226 v1(150.876,30.226) ; v1(160.782,18.669) 161.671,19.558 161.671,22.975 R47.1@162.826,24.13
  Bottom Layer w0.254: v1(150.876,30.226) 154.686,30.226 159.893,25.019 159.893,19.431 160.655,18.669 v1(160.782,18.669)
"HEADLIGHTS HIGH": R40.1 U1.70 | length 43.8
  Top Layer w0.254: U1.70 105.78,33.091 112.862,26.01 129.68,26.01 133.477,22.213 R40.1
"HEADLIGHTS LOW": R41.1 U1.71 | length 50.9
  Top Layer w0.254: U1.71 105.855,33.591 113.03,26.416 137.414,26.416 139.954,23.876 R41.1
"HEADLIGHTS OFF": R42.1 U1.78 | length 62.4
  Top Layer w0.254: U1.78 92.075,37.238 92.075,38.608 92.329,38.862 97.663,38.862 102.108,34.417 105.604,34.417 112.97,27.051 140.462,27.051 145.3,22.213 R42.1@146.05,22.213
HORN: R2.2 U1.95 | length 69.2
  Top Layer w0.254: R2.2 23.495,23.229 28.587,28.321 56.836,28.321 68.254,39.74 82.942,39.74 83.622,39.06 U1.95
"INTERIOR LIGHTS": R46.1 U1.82 | length 84.2
  Top Layer w0.254: U1.82 90.122,39.516 91.094,40.488 98.336,40.488 102.781,36.043 106.277,36.043 113.364,28.956 142.427,28.956 145.602,32.131 v1(150.876,32.131) ; v1(162.687,33.528) 162.687,31.508 R46.1
  Bottom Layer w0.254: v1(150.876,32.131) 155.702,32.131 155.956,31.877 157.607,33.528 v1(162.687,33.528)
"LAST SONG": R39.1 U1.67 | length 36.7
  Top Layer w0.254: U1.67 106.706,31.591 112.77,25.527 124.194,25.527 R39.1
NetC2_2: C2.2 U1.13 X1.2 | length 8.7
  Top Layer w0.254: C2.2 73.064,27.786 X1.2 ; X1.2@75.692,27.178 78.105,29.591 U1.13
NetC3_2: C3.2 U1.73 | length 4.2
  Top Layer w0.254: U1.73 96.186,34.591 96.532,34.937 C3.2@96.532,37.211
NetC4_2: C4.2 U1.49 | length 3.8
  Top Layer w0.254: C4.2 91.833,19.697 92.622,20.486 U1.49
NetC9_2: C9.2 D7.2 P1.2 R1.1 R27.2 | length 12.4
  Top Layer w0.254: R27.2 C9.2 ; P1.2 13.843,15.824 C9.2 ; R1.1 C9.2
  Bottom Layer w0.254: D7.2 P1.2@13.962,15.832
NetC10_2: C10.2 D8.1 P2.2 R2.1 R28.2 | length 12.1
  Top Layer w0.254: R28.2@19.177,21.602 R28.2 C10.2 ; P2.2@21.59,15.951 C10.2 ; R2.1 C10.2
  Bottom Layer w0.254: D8.1 P2.2@21.455,15.832
NetC11_2: C11.2 D9.1 P3.2 R3.1 R29.2 | length 12.5
  Top Layer w0.254: R29.2@26.797,21.602 C11.2 ; P3.2 C11.2 ; R3.1 C11.2
  Bottom Layer w0.254: D9.1 P3.2@29.075,15.832
NetC12_1: C12.1 D10.1 P4.2 R4.1 R30.1 | length 13.1
  Top Layer w0.254: R30.1 C12.1 ; P4.2 C12.1 ; R4.1@39.243,21.602 C12.1
  Bottom Layer w0.254: D10.1 P4.2@36.695,15.832
NetC13_1: C13.1 D11.1 P5.2 R5.1 R31.1 | length 13
  Top Layer w0.254: R31.1 C13.1 ; P5.2 C13.1 ; R5.1 C13.1
  Bottom Layer w0.254: D11.1 44.315,15.832 P5.2
NetC14_1: C14.1 D12.1 P6.4 R32.1 | length 10.7
  Top Layer w0.254: C14.1@49.174,21.831 51.841,21.831 R32.1@51.841,21.729 ; R32.1 51.841,21.704 P6.4
  Bottom Layer w0.254: D12.1 P6.4@51.834,15.832
NetC15_2: C15.2 D13.1 P7.4 R33.2 | length 10.8
  Top Layer w0.254: C15.2 61.214,21.832 ; R33.2 61.214,21.832 ; P7.4 61.214,16.993 61.214,21.832
  Bottom Layer w0.254: D13.1 62.375,15.832 P7.4
NetC16_2: C16.2 D14.2 P8.3 R34.2 R48.1 | length 9.8
  Top Layer w0.254: C16.2@75.311,19.685 C16.2 76.2,19.8 ; P8.3@76.2,15.85 76.2,19.8 ; R34.2 R48.1 76.2,19.8
  Bottom Layer w0.254: P8.3@76.182,15.832 D14.2
NetC17_2: C17.2 D15.2 P8.4 R35.2 R49.2 | length 12.1
  Top Layer w0.254: C17.2@69.469,21.832 72.148,21.832 72.39,21.59 72.39,19.812 ; P8.4 72.39,16.612 72.39,19.812 ; R35.2 72.402,19.8 72.39,19.812
  Bottom Layer w0.254: D15.2 P8.4@73.17,15.832
NetC18_2: C18.2 D18.1 P11.8 R15.2 R36.2 | length 11.6
  Top Layer w0.254: R36.2 C18.2 R15.2 112.903,16.644 P11.8
  Bottom Layer w0.254: D18.1@110.109,15.832 110.241,15.7 P11.8
NetC19_2: C19.2 D19.1 P11.7 R16.2 R37.2 | length 17.2
  Top Layer w0.254: P11.7 114.935,15.724 R37.2 C19.2 R16.2
  Bottom Layer w0.254: D19.1 111.252,10.033 113.538,12.319 113.538,14.279 P11.7
NetC20_2: C20.2 D20.1 P11.6 R17.2 R38.2 | length 18.3
  Top Layer w0.254: P11.6 121.285,19.026 R38.2 C20.2 R17.2 R17.2@125.476,20.713
  Bottom Layer w0.254: P11.6 119.507,14.152 119.507,11.895 D20.1
NetC21_2: C21.2 D21.2 P11.5 R18.2 R39.2 | length 15.6
  Top Layer w0.254: P11.5 122.531,17.272 125.73,17.272 127.508,19.05 R39.2 C21.2 R18.2
  Bottom Layer w0.254: P11.5 122.931,15.7 D21.2
NetC22_2: C22.2 D22.1 P13.4 R19.2 R40.2 | length 13.6
  Top Layer w0.254: P13.4 128.981,15.824 130.937,17.78 132.588,17.78 133.985,19.177 R40.2 R19.2@137.541,20.713
  Bottom Layer w0.254: D22.1 128.796,15.832 P13.4
NetC23_2: C23.2 D23.1 P13.3 R20.2 R41.2 | length 16.1
  Top Layer w0.254: P13.3 135.458,15.824 ; 135.509,15.875 139.954,20.32 R41.2 C23.2 R20.2@143.764,20.713
  Bottom Layer w0.254: P13.3 133.596,15.824 D23.1@133.731,15.959
NetC24_2: C24.2 D24.1 P13.2 R21.2 R42.2 | length 29.8
  Top Layer w0.254: P13.2 130.327,14.351 135.763,14.351 139.065,17.653 144.272,17.653 145.796,19.177 R42.2 R21.2@149.733,20.713
  Bottom Layer w0.254: D24.1 126.746,10.77 P13.2
NetC25_2: C25.2 D25.1 P14.4 R22.2 R43.2 | length 22.7
  Top Layer w0.254: P14.4@139.344,15.697 P14.4@139.471,15.824 ; P14.4 140.538,17.145 144.78,17.145 147.193,19.558 152.273,19.558 153.543,20.828 R22.2 C25.2 R43.2
  Bottom Layer w0.254: D25.1 139.21,16.086 P14.4
NetC26_2: C26.2 D26.1 P14.3 R23.2 R44.2 | length 28.9
  Top Layer w0.254: P14.3@142.342,15.697 P14.3@142.596,15.951 ; P14.3 P14.3@142.596,15.951 ; R44.2 C26.2 R23.2 155.067,25.896 155.067,20.066 153.924,18.923 147.701,18.923 144.729,15.951 P14.3@142.596,15.951
  Bottom Layer w0.254: P14.3 142.349,15.959 D26.1
NetC27_2: C27.2 D27.1 P14.2 R24.2 R45.2 | length 42.9
  Top Layer w0.254: P14.2 141.122,14.732 144.653,14.732 147.955,18.034 154.33,18.034 155.473,19.177 155.473,30.726 153.658,32.541 R24.2 C27.2 R45.2
  Bottom Layer w0.254: D27.1 137.414,11.024 P14.2
NetC28_1: C28.1 D28.1 P15.2 R25.1 R46.2 | length 29.4
  Top Layer w0.254: P15.2 149.86,16.002 151.13,17.272 158.877,17.272 159.537,17.932 159.537,24.663 160.274,25.4 163.183,25.4 164.199,26.416 164.199,30.988
  Bottom Layer w0.254: D28.1 P15.2@149.852,15.832
NetC29_1: C29.1 D29.1 P16.2 R26.1 R47.2 | length 16
  Top Layer w0.254: P16.2@157.302,16.002 P16.2 162.382,15.824 164.211,17.653 R47.2@164.211,24.13
  Bottom Layer w0.254: D29.1 P16.2@157.345,15.959
NetD1_1: D1.1 R6.2 | length 14.4
  Top Layer w0.254: D1.1 68.323,32.134 v1(70.104,30.353)
  Bottom Layer w0.254: v1(70.104,30.353) 70.104,30.226 77.216,23.114 R6.2
NetD1_2: D1.2 R7.2 | length 11.6
  Top Layer w0.254: D1.2 69.472,29.334 v1(70.231,28.575)
  Bottom Layer w0.254: v1(70.231,28.575) 70.346,28.46 70.346,26.543 R7.2
NetD1_3: D1.3 R8.2 | length 14.6
  Top Layer w0.254: v1(64.516,28.448) 65.402,29.334 D1.3
  Bottom Layer w0.254: v1(64.516,28.448) 64.516,27.686 70.37,21.832 R8.2
NetD6_2: D6.2 R14.1 | length 1.6
  Top Layer w0.254: D6.2 R14.1@131.791,33.227
"NEXT SONG": R38.1 U1.66 | length 30.2
  Top Layer w0.254: U1.66@94.746,31.115 106.607,31.115 112.601,25.121 118.377,25.121 R38.1
NRST: C5.1 P12.15 R9.2 SW1.1 U1.14 | length 99
  Top Layer w0.254: SW1.1 46.228,37.592 44.577,39.243 24.765,39.243 22.225,36.703 23.749,35.179 23.749,33.655 23.914,33.49 23.914,33.451 25.742,31.623 R9.2 47.002,30.873 47.395,30.48 50.8,30.48 51.943,31.623 v1(53.086,31.623) ; U1.14 80.529,29.091 80.851,28.769 80.851,27.988 v1(82.296,26.543)
  Bottom Layer w0.254: v1@52.832,31.496 70.739,31.496 72.517,29.718 81.165,29.718 C5.1 82.435,26.682 v1(82.296,26.543)
PUSH-TO-TALK: R1.2 U1.93 | length 77.6
  Top Layer w0.254: R1.2 21.754,28.727 56.667,28.727 68.086,40.146 83.111,40.146 84.622,38.635 U1.93
RED_LED: R6.1 U1.30 | length 8.2
  Top Layer w0.254: v1(82.169,19.431) 82.169,19.685 83.122,20.638 U1.30
  Bottom Layer w0.254: R6.1 77.99,19.431 v1(82.169,19.431)
"REGEN BRAKING 1": R10.2 R32.2 | length 4.1
  Top Layer w0.254: R32.2@51.816,23.356 52.844,23.356 53.086,23.114 53.086,22.098 53.328,21.856 R10.2@54.356,21.856 ; R10.2 R10.2@54.356,21.856 ; R10.2@54.483,21.856 R10.2@54.356,21.856
"REGEN BRAKING 2": D2.1 R10.1 R11.2 U1.24 | length 27.9
  Top Layer w0.254: R10.1 54.622,23.368 D2.1 57.492,24.091 60.325,24.091 ; R11.2 60.325,24.091 ; 78.447,24.091 60.325,24.091 ; U1.24@78.613,24.091 U1.24
RESET: R3.2 U1.96 | length 60.4
  Top Layer w0.254: R3.2 36.182,27.915 57.004,27.915 68.423,39.333 82.714,39.333 83.122,38.925 U1.96
REVERSE: R45.1 U1.83 | length 73.8
  Top Layer w0.254: U1.83 89.622,39.584 89.716,39.678 89.716,39.684 90.926,40.894 98.505,40.894 102.95,36.449 106.445,36.449 113.532,29.362 141.757,29.362 150.241,37.846 R45.1
SCLK: C1.2 U1.12 X1.1 | length 8.7
  Top Layer w0.254: C1.2 75.526,32.881 X1.1@75.78,32.627 ; X1.1@75.819,32.258 75.819,31.369 77.097,30.091 U1.12
"SIGNAL LIGHTS LEFT": R34.1 U1.42 | length 13.2
  Top Layer w0.254: R34.1 79.998,18.3 80.518,17.78 86.995,17.78 89.154,19.939 89.154,21.959 U1.42
"SIGNAL LIGHTS RIGHT": R35.1 U1.41 | length 21.8
  Top Layer w0.254: R35.1 74.053,18.3 74.295,18.542 74.295,20.447 74.422,20.574 80.01,20.574 80.391,20.193 80.391,18.669 80.772,18.288 86.868,18.288 88.622,20.042 U1.41
SWCLK: P12.9 U1.76 | length 70
  Top Layer w0.254: v1(90.043,32.639) 90.043,34.544 91.186,35.687 92.625,35.687 93.122,36.184 U1.76
  Bottom Layer w0.254: P12.9@30.099,36.449 P12.9 31.369,38.227 43.307,38.227 46.863,34.671 77.47,34.671 79.502,32.639 v1(90.043,32.639)
SWDIO: P12.7 U1.72 | length 79
  Top Layer w0.254: U1.72 98.607,34.091 v1(99.187,34.671)
  Bottom Layer w0.254: P12.7 34.074,35.522 34.074,33.235 34.925,32.385 45.339,32.385 46.228,33.274 69.342,33.274 70.358,32.258 74.418,32.258 76.323,30.353 90.297,30.353 91.694,28.956 93.472,28.956 v1(99.187,34.671)
SWO: P12.13 U1.89 | length 69.7
  Top Layer w0.254: P12.13@25.019,36.449 27.305,38.735 42.799,38.735 46.609,34.925 51.562,34.925 52.578,35.941 v1(52.578,37.465) ; v1@86.622,34.671 U1.89
  Bottom Layer w0.254: v1(52.578,37.465) 54.864,37.465 56.642,35.687 85.598,35.687 v1(86.614,34.671)
UART1_RX: P12.17 U1.69 | length 78.6
  Top Layer w0.254: v1@91.869,32.591 U1.69
  Bottom Layer w0.254: P12.17@19.939,36.449 P12.17 21.844,38.862 43.307,38.862 47.092,35.077 77.638,35.077 78.959,33.757 90.703,33.757 v1(91.821,32.639)
UART1_TX: P12.5 U1.68 | length 62.4
  Top Layer w0.254: v1(91.821,30.861) 92.075,30.861 93.305,32.091 U1.68
  Bottom Layer w0.254: P12.5@35.179,36.449 35.941,35.687 43.053,35.687 44.704,34.036 77.216,34.036 80.391,30.861 v1(91.821,30.861)
"VOLUME DOWN": R36.1 U1.64 | length 19.5
  Top Layer w0.254: U1.64@94.755,30.124 104.72,30.124 107.315,27.53 107.315,23.483 R36.1
"VOLUME UP": R37.1 U1.65 | length 23.7
  Top Layer w0.254: U1.65@94.757,30.626 106.521,30.626 113.881,23.266 ; 113.882,23.266 R37.1
pads on no net: P1. P2. P3. P4. P5. P6. P7. P8. P9. P9.3 P9.6 P10. P10.3 P10.6 P11. P12.2 P12.3 P12.11 P12.14 P12.16 P12.18 P12.20 P13. P14. P15. P16. U1.1 U1.2 U1.3 U1.4 U1.5 U1.7 U1.8 U1.9 U1.15 U1.16 U1.17 U1.18 U1.26 U1.29 U1.33 U1.34 U1.35 U1.36 U1.37 U1.38 U1.39 U1.40 U1.43 U1.44 U1.45 U1.46 U1.47 U1.48 U1.53 U1.54 U1.55 U1.56 U1.57 U1.58 U1.59 U1.60 U1.61 U1.62 U1.63 U1.77 U1.84 U1.85 U1.86 U1.87 U1.88 U1.90 U1.91 U1.92

## Polygon pours and split planes (outlines as drawn)
GND on Top Layer "GND-Top" (solid, pour order 6): 4.953,41.528 166.622,41.528 166.751,41.657 166.751,3.429 4.826,3.429
GND on Bottom Layer "GND-Bot" (solid, pour order 8): 4.826,41.528 4.955,41.657 166.751,41.657 166.751,3.429 4.826,3.429

## Keep-outs
Keep-Out Layer:
  circle w0.762: c6.223,38.354 r2.54
  circle w0.762: c6.223,6.477 r2.54
  circle w0.762: c165.227,6.477 r2.54
  circle w0.762: c165.227,38.354 r2.54
  lines w0.254: 3.048,3.302 168.402,3.302 168.402,41.66 3.048,41.528 3.048,3.302

## Silkscreen, mask and mechanical layers (free items; w line width, h text height)
Top Overlay:
  text "Driver Controls Board v1.0" at 82.169,39.243 h1.14
  text "Mark Ricalde" at 67.437,38.862 h1.14
Bottom Overlay:
  text "Signal Lights" at 73.406,25.527 h1.14 r270
  text "CAN" at 83.439,20.574 h1.14 r270
  text "Acceleration" at 61.976,19.558 h1.14 r270
  text "Reset" at 28.702,18.669 h1.14 r270
  text "Push-to-Talk" at 13.335,18.542 h1.14 r270
  text "Horn" at 20.955,18.415 h1.14 r270
  text "Regen Braking" at 52.705,18.288 h1.14 r270
  text "Hazard Lights" at 156.083,18.288 h1.14 r270
  text "Brake Switch" at 41.656,18.161 h1.14 r270
  text "FWD, REV, AUX" at 139.7,18.161 h1.14 r270
  text "Context" at 34.163,18.034 h1.14 r270
  text "Interior Lights" at 148.844,18.034 h1.14 r270
  text "Headlights" at 127,17.907 h1.14 r270
  text "Media Controls" at 120.523,17.526 h1.14 r270